# Altium PCB Dustbike_Core.PcbDoc
Units mm, origin at the board's own origin, x right, y up, seen from the top; angles counter-clockwise.
Board outline 79.76 x 109.98 mm, 2 copper layers (Top Layer, Bottom Layer), stack 1.571 mm thick; 41 components, 40 nets, 146 pads, 86 vias.
Unrouted connection lines stored in the file: 30.
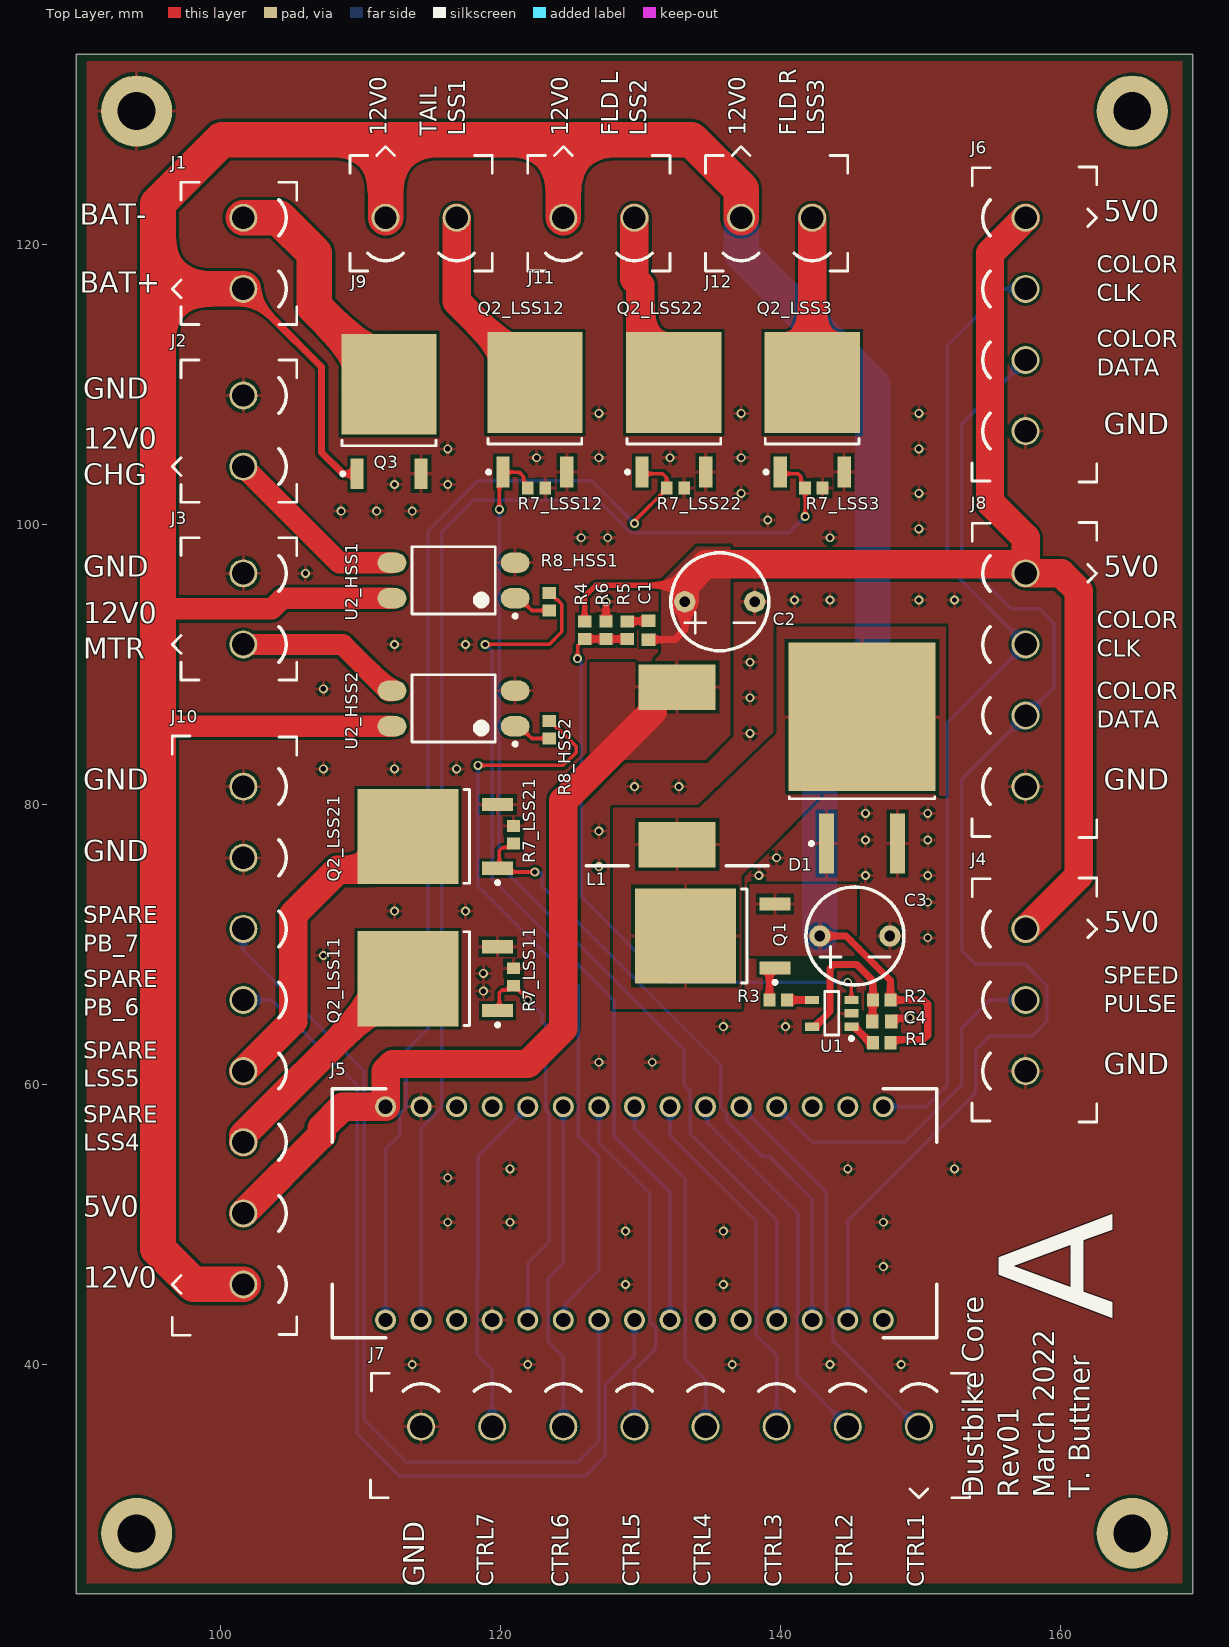
[diagram p0: Top Layer view]
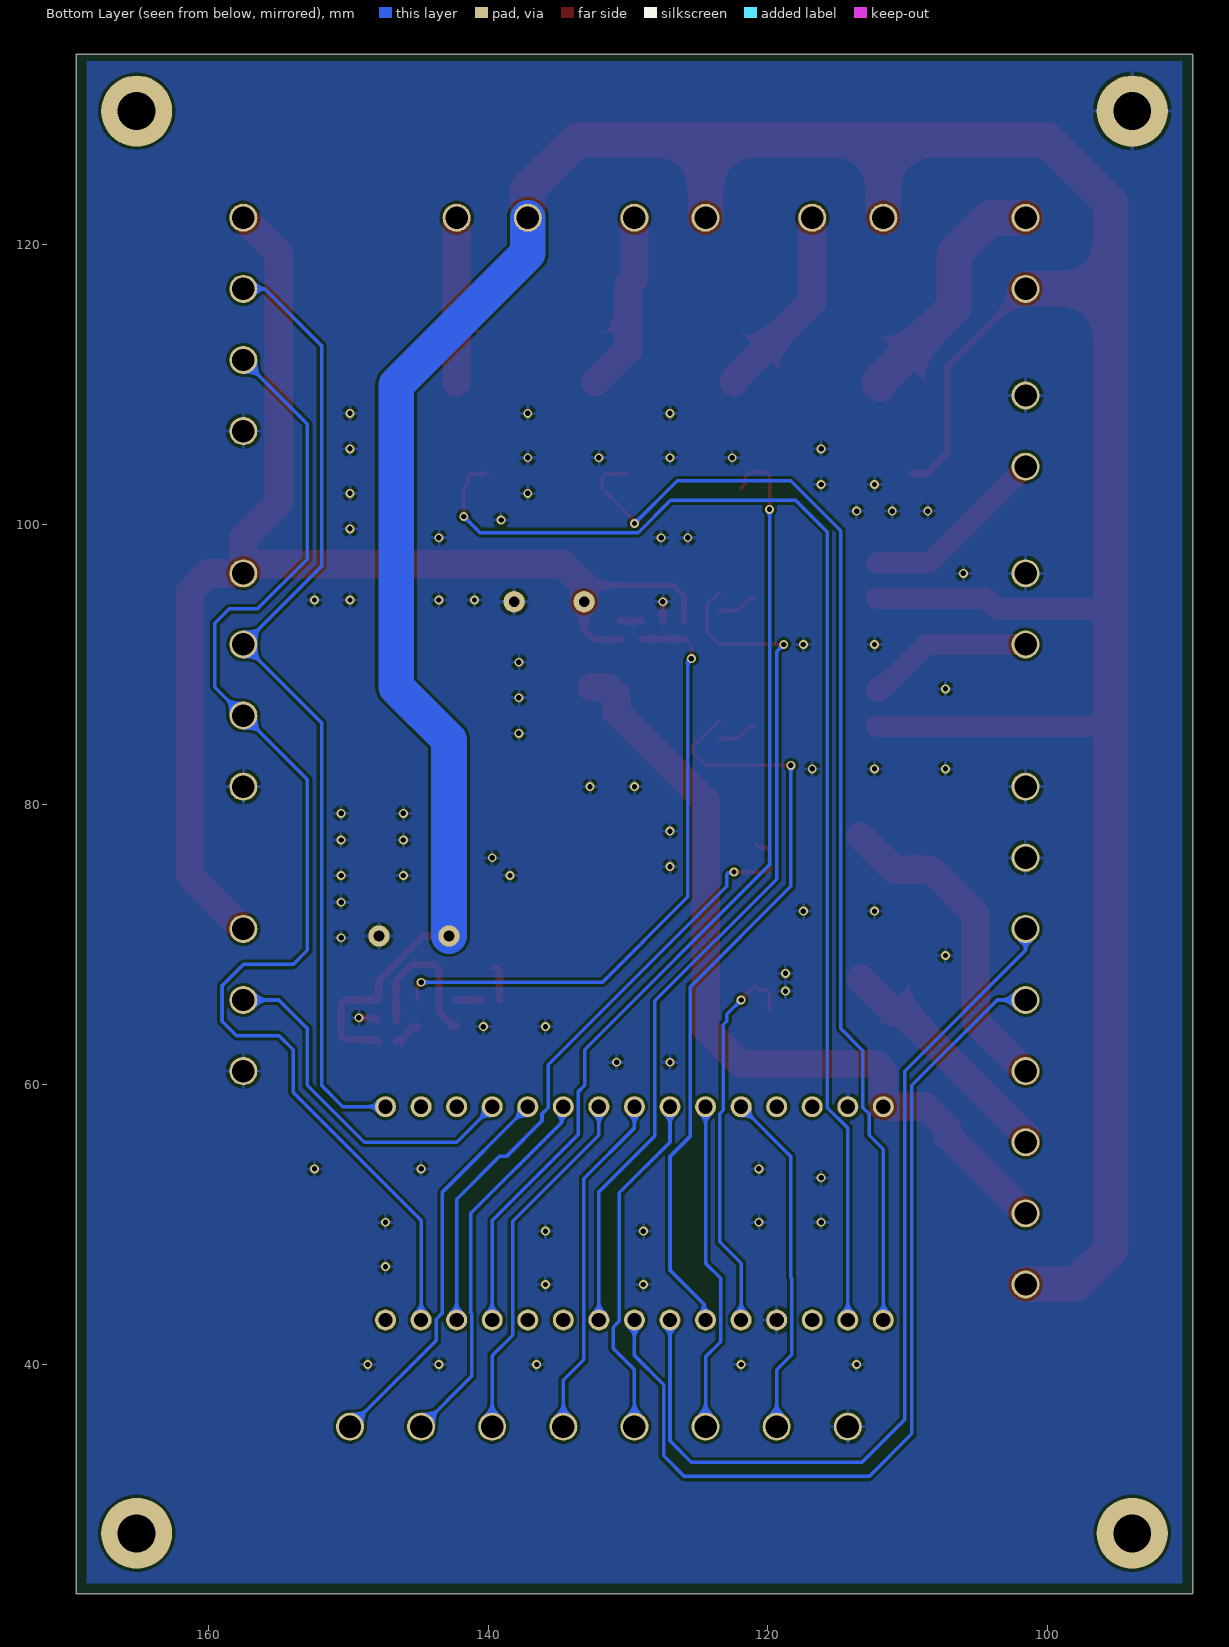
[diagram p1: Bottom Layer view, seen from below]
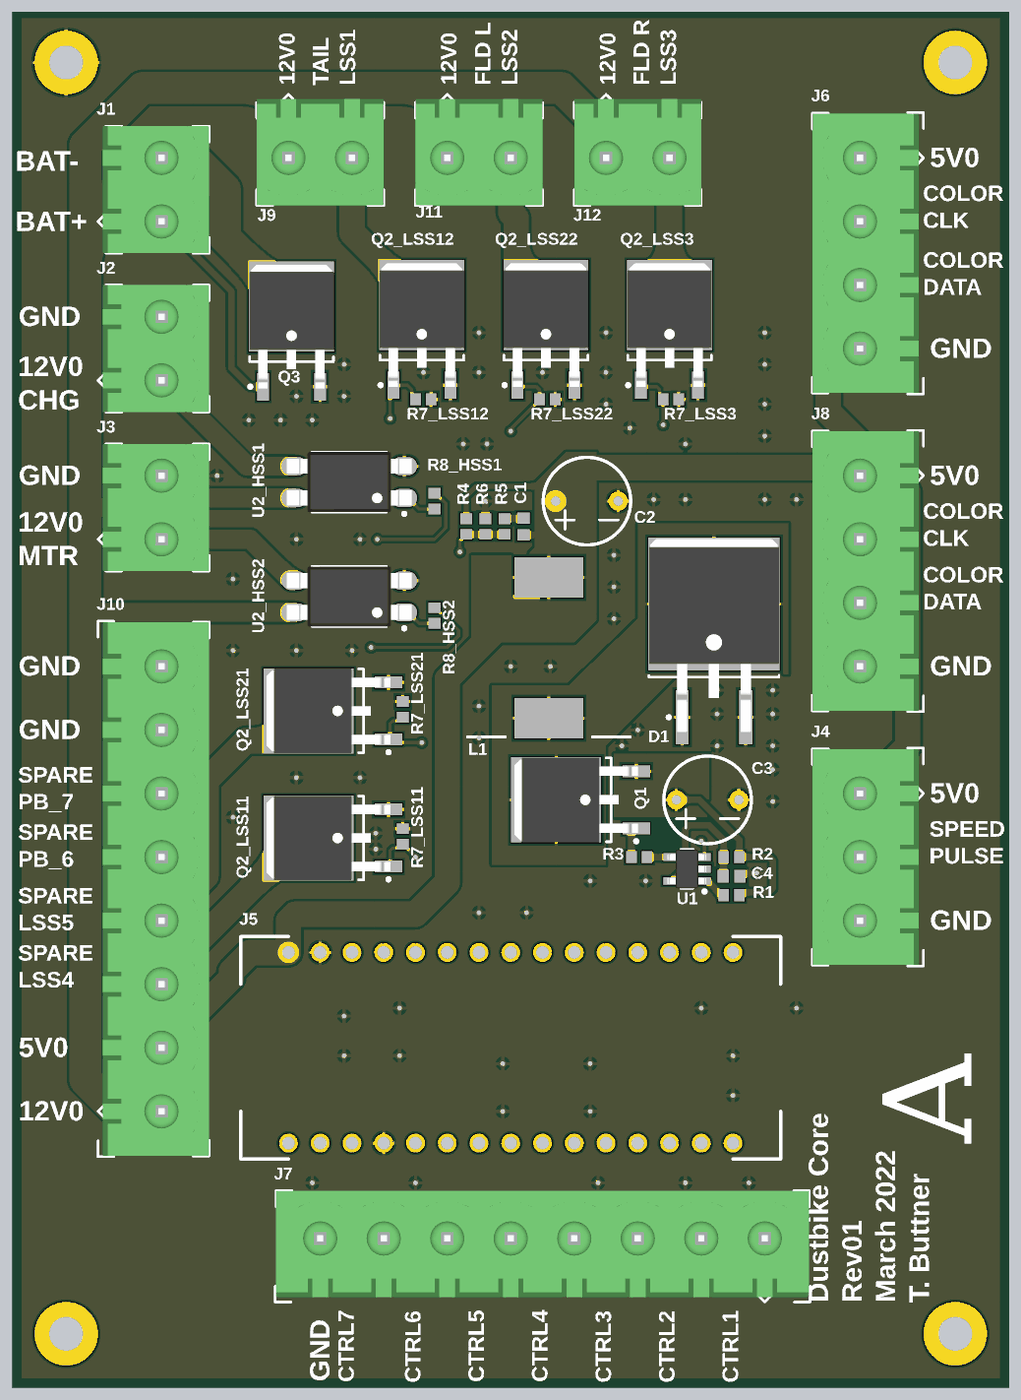
[diagram p2: 3D render of the assembled board from above, using the file's embedded part models]

## Layer stack, top to bottom
Top Solder: solder mask 0.0102, Solder Resist, Dk 3.5
Top Layer: signal copper 0.0356
Dielectric 1: dielectric 1.5, FR-4, Dk 4.8
Bottom Layer: signal copper 0.0356
Bottom Solder: solder mask 0.0102, Solder Resist, Dk 3.5

## Board outline
89.662,23.622 89.662,133.604 169.418,133.604 169.418,23.622

## Design rules (kind name [scope] priority, off if disabled: settings)
Clearance Clearance_1 [All] p1: gap=0.203 ignorepadtopadclearanceinfootprint=FALSE
Clearance Poly_Board_Edge_Clearance [OnLayer('Mechanical 1') vs InPolygon] p2: gap=0.381 ignorepadtopadclearanceinfootprint=FALSE
HoleSize [All] p1: absolutevalues=TRUE maxlimit=6.35 minlimit=0.3 maxpercent=80.000 minpercent=20.000
MinimumSolderMaskSliver [All] p1: minsoldermaskwidth=0.076
PolygonConnect [All] p1: connectstyle=Relief reliefconductorwidth=0.254 reliefentries=4 polygonreliefangle="90 Angle" airgapwidth=0.254
RoomDefinition HSS2 [InComponentClass('HSS2')] p1: confinementstyle=ConfineIn formatcopy=TRUE lockcomponents=FALSE outline 124.46,83.312 124.46,90.932 108.712,90.932 108.712,83.312
RoomDefinition HSS1 [InComponentClass('HSS1')] p2: confinementstyle=ConfineIn formatcopy=TRUE lockcomponents=FALSE outline 124.46,92.456 124.46,100.076 108.712,100.076 108.712,92.456
RoomDefinition LSS22 [InComponentClass('LSS22')] p3: confinementstyle=ConfineIn formatcopy=TRUE lockcomponents=FALSE outline 136.418,101.092 136.418,114.808 128.29,114.808 128.29,101.092
RoomDefinition LSS21 [InComponentClass('LSS21')] p4: confinementstyle=ConfineIn formatcopy=TRUE lockcomponents=FALSE outline 122.428,81.788 108.712,81.788 108.712,73.66 122.428,73.66
RoomDefinition LSS12 [InComponentClass('LSS12')] p5: confinementstyle=ConfineIn formatcopy=TRUE lockcomponents=FALSE outline 126.492,101.092 126.492,114.808 118.364,114.808 118.364,101.092
RoomDefinition LSS11 [InComponentClass('LSS11')] p6: confinementstyle=ConfineIn formatcopy=TRUE lockcomponents=FALSE outline 122.428,71.628 108.712,71.628 108.712,63.5 122.428,63.5
RoomDefinition LSS3 [InComponentClass('LSS3')] p7: confinementstyle=ConfineIn formatcopy=TRUE lockcomponents=FALSE outline 146.304,101.092 146.304,114.808 138.176,114.808 138.176,101.092
RoutingVias [All] p1: holewidth=0.381 width=0.635 viastyle="Through Hole" minholewidth=0.305 minwidth=0.381 maxholewidth=0.711 maxwidth=1.27
SilkToSilkClearance [All] p1: silktosilkclearance=0.076
SilkToSolderMaskClearance [IsPad] p1: minsilkscreentomaskgap=0.076 clearancetoexposedcopper=TRUE
SolderMaskExpansion [All] p1: expansion=0.102 istentingtop=FALSE
Width [All] p1: maxlimit=2.54 minlimit=0.203 preferedwidth=0.254
26 further rules are at their usual default settings.

## Classes and differential pairs
channel class Low_Side_Switch: LSS3 LSS11 LSS12 LSS21 LSS22
channel class High_Side_Switch: HSS1 HSS2
net class CTRL_IN_[1..7]: CTRL_IN_1 CTRL_IN_2 CTRL_IN_3 CTRL_IN_4 CTRL_IN_5 CTRL_IN_6 CTRL_IN_7
component class LSS22: Q2_LSS22 R7_LSS22
component class LSS21: Q2_LSS21 R7_LSS21
component class LSS12: Q2_LSS12 R7_LSS12
component class LSS11: Q2_LSS11 R7_LSS11
component class LSS3: Q2_LSS3 R7_LSS3
component class HSS2: R8_HSS2 U2_HSS2
component class HSS1: R8_HSS1 U2_HSS1
component class Dustbike_Core_Top: J1 J2 J3 J4 J5 J6 J7 J8 J9 J10 J11 J12 Q3 R1
component class BUCK: C1 C2 C3 C4 D1 L1 Q1 R2 R3 R4 R5 R6 U1

## Components (designator, comment, footprint, x,y, rotation, side; value= is the part's Value field where it differs from the comment)
C1 "CAP" CAPC1608X09N 130.556,92.456 r90 top value="1000 pF"
C2 "CAP-POL" CAP_TH_5X12_L5 135.636,94.488 r0 top value=10uF
C3 "CAP-POL" CAP_TH_5X12_L5 145.288,70.612 r0 top value=10uF
C4 "CAP" CAPC1608X09N 147.203,64.516 r0 top value="0.1 uF"
D1 "DIO-Schottky_STPS8L30B-TR" DPAK254P1540X460-3N_STPS5045SG-TR 145.796,83.316 r90 top
J1 "HDR_2POS" WURTH_691311500002 101.6,116.84 r90 top
J2 "HDR_2POS" WURTH_691311500002 101.6,104.14 r90 top
J3 "HDR_2POS" WURTH_691311500002 101.6,91.44 r90 top
J4 "HDR_3POS" WURTH_691311500103 157.48,71.12 r270 top
J5 "NUCLEO_NANO" NANO_HEADER 111.76,43.18 r90 top
J6 "HDR_4POS" WURTH_691311500104 157.48,121.92 r270 top
J7 "HDR_8POS" WURTH_691311500108 149.86,35.56 r180 top
J8 "HDR_4POS" WURTH_691311500104 157.48,96.52 r270 top
J9 "HDR_2POS" WURTH_691311500002 111.76,121.92 r0 top
J10 "HDR_8POS" WURTH_691311500108 101.6,45.72 r90 top
J11 "HDR_2POS" WURTH_691311500002 124.46,121.92 r0 top
J12 "HDR_2POS" WURTH_691311500002 137.16,121.92 r0 top
L1 "INDUCTOR" 125CDMCCDS-100MC 132.588,77.142 r90 top
Q1 "PFET_SOT323" DPAK228P991X238-3N_AOD413A 135.128,70.612 r180 top
Q2_LSS3 "NFET_SOT323" DPAK228P991X238-3N_NTD4815NHT4G 142.24,108.204 r90 top (schematic designator Q2)
Q2_LSS11 "NFET_SOT323" DPAK228P991X238-3N_NTD4815NHT4G 115.316,67.564 r180 top (schematic designator Q2)
Q2_LSS12 "NFET_SOT323" DPAK228P991X238-3N_NTD4815NHT4G 122.428,108.204 r90 top (schematic designator Q2)
Q2_LSS21 "NFET_SOT323" DPAK228P991X238-3N_NTD4815NHT4G 115.316,77.724 r180 top (schematic designator Q2)
Q2_LSS22 "NFET_SOT323" DPAK228P991X238-3N_NTD4815NHT4G 132.354,108.204 r90 top (schematic designator Q2)
Q3 "NFET_SOT323" DPAK228P991X238-3N_NTD4815NHT4G 112.008,108.082 r90 top
R1 "RES" RESC1508X09N 147.203,62.992 r0 top value=82k
R2 "RES" RESC1508X09N 147.203,66.04 r0 top value=10
R3 "RES" RESC1508X09N 139.817,66.04 r180 top value=0
R4 "RES" RESC1508X09N 125.984,92.456 r90 top value=82k
R5 "RES" RESC1508X09N 129.032,92.456 r270 top value=2.7k
R6 "RES" RESC1508X09N 127.508,92.456 r270 top value=20k
R7_LSS3 "RES" RESC1508X09N 142.357,102.616 r180 top value=100k (schematic designator R7)
R7_LSS11 "RES" RESC1508X09N 120.904,67.681 r270 top value=100k (schematic designator R7)
R7_LSS12 "RES" RESC1508X09N 122.545,102.616 r180 top value=100k (schematic designator R7)
R7_LSS21 "RES" RESC1508X09N 120.904,77.841 r270 top value=100k (schematic designator R7)
R7_LSS22 "RES" RESC1508X09N 132.471,102.616 r180 top value=100k (schematic designator R7)
R8_HSS1 "RES" RESC1508X09N 123.444,94.488 r270 top value=100 (schematic designator R8)
R8_HSS2 "RES" RESC1508X09N 123.444,85.344 r270 top value=100 (schematic designator R8)
U1 "R1224N102M" SOT95P280X120-5N_R1224N102M 143.64,65.09 r180 top
U2_HSS1 "SSR_SPST-NO" SOP254P1000X425-4N_TLP241AF 116.621,96.012 r180 top (schematic designator U2)
U2_HSS2 "SSR_SPST-NO" SOP254P1000X425-4N_TLP241AF 116.621,86.868 r180 top (schematic designator U2)

## Footprints (in the part's own frame and the unit in brackets; to place one, negate y for a bottom-side part, rotate by r counter-clockwise, add the part's x,y. Pads: shape width x height; smd on the part's side, far side on the other; paste and mask are expansions set on the pad)
125CDMCCDS-100MC [mm]
  rect 3.25x5.5 smd: 1(0,0) 2(11.25,0)
  silkscreen extent -1.5,-6.5 -1.5,6.5, body extent -1.15,-6.5 12.35,6.5, height 5
CAP_TH_5X12_L5 [mil] "Cap, Aluminum Electrolytic, 5mm Lead Spacing, 12mm Height, Vertical Mount"
  round 60 hole 30: 1(-98.43,0) 2(98.43,0)
  silkscreen extent -138,-138 138,138, body extent -124,-124 124,124, height 472
CAPC1608X09N [mm] "Chip Capacitor, 2-Leads, Body 1.60x0.80mm, IPC Medium Density"
  rect 0.9x1 smd: 1(-0.675,0) 2(0.675,0)
  body extent -0.87,-0.48 0.87,0.47, height 0.95
DPAK228P991X238-3N_AOD413A [mm] "D-PAK, 3-Pads, Body 6.21x6.73mm (max), IPC Medium Density"
  rect 7.2x6.8 smd: D(1.95,0)
  rect 2.2x0.95 smd: G(-4.45,2.28) S(-4.45,-2.28)
  silkscreen extent -4.57,-3.35 -2.05,3.43, body extent -4.6,-3.37 5.31,3.37, height 2.38
DPAK228P991X238-3N_NTD4815NHT4G [mm] "D-PAK, 3-Pads, Body 6.21x6.73mm (max), IPC Medium Density"
  rect 7.2x6.8 smd: D(1.95,0)
  rect 2.2x0.95 smd: G(-4.45,2.28) S(-4.45,-2.28)
  silkscreen extent -4.57,-3.35 -2.05,3.43, body extent -4.6,-3.37 5.31,3.37, height 2.38
DPAK254P1540X460-3N_STPS5045SG-TR [mm] "D2-PAK, 3-Pads, Body 7.78x8.56mm (max), IPC Medium Density"
  rect 4.3x1.05 smd: A(-6.1,-2.54) A(-6.1,2.54)
  rect 10.6x10.5 smd: K(2.95,0)
  silkscreen extent -6.22,-5.2 -2.75,5.2, body extent -7.26,-5.2 8.14,5.2, height 4.6
NANO_HEADER [mm] "Arduino / Nucleo \"Nano\" Headers"
  round 1.5 hole 1.02: 1(0,0) 2(0,-2.54) 3(0,-5.08) 4(0,-7.62) 5(0,-10.16) 6(0,-12.7) 7(0,-15.24) 8(0,-17.78) 9(0,-20.32) 10(0,-22.86) 11(0,-25.4) 12(0,-27.94) 13(0,-30.48) 14(0,-33.02) 15(0,-35.56) 16(15.24,-35.56) 17(15.24,-33.02) 18(15.24,-30.48) 19(15.24,-27.94) 20(15.24,-25.4) 21(15.24,-22.86) 22(15.24,-20.32) 23(15.24,-17.78) 24(15.24,-15.24) 25(15.24,-12.7) 26(15.24,-10.16) 27(15.24,-7.62) 28(15.24,-5.08) 29(15.24,-2.54) 30(15.24,0)
  silkscreen extent -1.27,-39.37 16.51,3.81, body extent -1.27,-39.37 16.51,3.81, height 15
RESC1508X09N [mm] "Chip Resistor, 2-Leads, Body 1.55x0.80mm, IPC Medium Density"
  rect 0.85x0.95 smd: 1(-0.625,0) 2(0.625,0)
  body extent -0.85,-0.48 0.85,0.48, height 0.95
SOP254P1000X425-4N_TLP241AF [mm] "SOP, 4-Leads, Body 4.58x6.40mm, Pitch 2.54mm, IPC Medium Density"
  oval 2.05x1.45 smd: 1(-4.4,1.27) 2(-4.4,-1.27) 3(4.4,-1.27) 4(4.4,1.27)
  silkscreen extent -4.52,-2.4 2.98,2.67, body extent -5,-2.4 5,2.4, height 4.25
SOT95P280X120-5N_R1224N102M [mm] "SOT23, 5-Leads, Body 2.90x2.80mm, Pitch 0.95mm, IPC Medium Density"
  rect 1x0.6 smd: 1(-1.4,0.95) 2(-1.4,0) 3(-1.4,-0.95) 4(1.4,-0.95) 5(1.4,0.95)
  silkscreen extent -1.53,-1.55 0.5,1.92, body extent -1.55,-1.55 1.55,1.55, height 1.2
WURTH_691311500002 [mm]
  round 2 hole 1.6: 1(0,0) 2(5.08,0)
  silkscreen extent -2.54,-3.81 7.62,5.08, body extent -2.54,-3.8 7.62,4.7, height 12
WURTH_691311500103 [mm]
  round 2 hole 1.6: 1(0,0) 2(5.08,0) 3(10.16,0)
  silkscreen extent -3.63,-3.82 13.79,5.08, body extent -3.54,-3.8 13.7,4.7, height 12
WURTH_691311500104 [mm]
  round 2 hole 1.6: 1(0,0) 2(5.08,0) 3(10.16,0) 4(15.24,0)
  silkscreen extent -3.63,-3.82 18.87,5.08, body extent -3.54,-3.8 18.78,4.7, height 12
WURTH_691311500108 [mm]
  round 2 hole 1.6: 1(0,0) 2(5.08,0) 3(10.16,0) 4(15.24,0) 5(20.32,0) 6(25.4,0) 7(30.48,0) 8(35.56,0)
  silkscreen extent -3.63,-3.82 39.17,5.08, body extent -3.54,-3.8 39.1,4.7, height 12

## Part data
C1: library part CAP-SMT-0004, "CAP CER 1000PF 50V X7R 0603", Manufacturer 1="Samsung Electro-Mechanics", Manufacturer Part Number 1=CL10B102KB8NNNC, Operating Temperature="-55°C ~ 125°C", Package / Case=0603, Supplier Part Number 1=1276-1018-1-ND, Temperature Coefficient=X7R, Tolerance=10%, Voltage-Rated=50V, Size / Dimension="0.063\" L x 0.031\" W (1.60mm x 0.80mm)", Supplier 1=Digi-Key, Supplier Link 1=https://www.digikey.com/en/products/detail/samsung-electro-mechanics/CL10B102KB8NNNC/3886676, TPN=CAP-SMT-0004
C2: library part CAP-TH-0004, "CAP ALUM 47UF 20% 25V RADIAL", Lifetime @ Temp=2000, Manufacturer 1=KEMET, Manufacturer Part Number 1=ESK476M025AC3FA, Operating Temperature="-40°C ~ 85°C", Package / Case="Radial, Can", Ripple Current @ High Frequency="202.5 mA @ 10 kHz", Ripple Current @ Low Frequency="135 mA @ 120 Hz", Supplier Part Number 1=399-ESK476M025AC3FACT-ND, Tolerance=20%, Voltage-Rated=25V, ESR=-, Height - Seated (Max)="0.492\"(12.5mm)", Lead Spacing="0.197\" (5.00mm)", Mounting Type="Through Hole", Polarization=Polar, Size / Dimension="0.197\" Dia (5.00mm))", Supplier 1=Digi-Key, Supplier Link 1=https://www.digikey.com/en/products/detail/kemet/ESK476M025AC3FA/13979958, TPN=CAP-TH-0004
C3: library part CAP-TH-0001, "CAP ALUM 10UF 20% 25V RADIAL", Lifetime @ Temp=2000, Manufacturer 1="Panasonic Electronic Components", Manufacturer Part Number 1=ECA-1EM100B, Operating Temperature="-40°C ~ 85°C", Package / Case="Radial, Can", Ripple Current @ High Frequency="85mA @ 10kHz", Ripple Current @ Low Frequency="50mA @ 120Hz", Supplier Part Number 1=P19522CT-ND, Tolerance=20%, Voltage-Rated=25V, ESR=-, Height - Seated (Max)="0.472\" (12.00mm)", Lead Spacing="0.197\" (5.00mm)", Mounting Type="Through Hole", Polarization=Polar, Size / Dimension="0.197\" Dia (5.00mm))", Supplier 1=Digi-Key, Supplier Link 1=https://www.digikey.com/product-detail/en/panasonic-electronic-components/ECA-1EM100B/P19522CT-ND/6109420, TPN=CAP-TH-0001
C4: library part CAP-SMT-0001, "CAP CER 0.1UF 25V X5R 0603", Manufacturer 1="Samsung Electro-Mechanics", Manufacturer 2="Taiyo Yuden", Manufacturer Part Number 1=CL10A104KA8NNNC, Manufacturer Part Number 2=EMK107BJ104KAHT, Operating Temperature="-55°C ~ 85°C", Package / Case=0603, Supplier Part Number 1=1276-1857-1-ND, Temperature Coefficient=X5R, Tolerance=20%, Voltage-Rated=25V, Size / Dimension="0.063\" L x 0.031\" W (1.60mm x 0.80mm)", Supplier 1=Digi-Key, Supplier 2=Digi-Key, Supplier Link 1=http://www.samsungsem.com/kr/support/product-search/mlcc/CL10A104KA8NNNC.jsp, Supplier Part Number 2=587-3308-1-ND, TPN=CAP-SMT-0001
D1: library part DIO-GEN-0003, "DIODE SCHOTTKY 45V 50A D2PAK", Current - Average Rectified (Io)=50A, Current - Reverse Leakage @ Vr="360µA @ 45V", Manufacturer 1=STMicroelectronics, Manufacturer Part Number 1=STPS5045SG-TR, Operating Temperature - Junction="200°C (Max)", Package / Case="TO-263-3, D²Pak (2 Leads + Tab), TO-263AB", Supplier Part Number 1=497-13279-1-ND, Voltage - DC Reverse (Vr) (Max)=45V, Voltage - Forward (Vf) (Max) @ If="610mV @ 50A", Mounting Type="Surface Mount", Speed="Fast Recovery =< 500ns, > 200mA (Io)", Supplier 1=Digi-Key, Supplier 1 Link=https://www.digikey.com/en/products/detail/stmicroelectronics/STPS5045SG-TR/3661704, Supplier Device Packaging=D²PAK, TPN=DIO-GEN-0003
J1 J2 J3 J9 J11 J12: library part GEN-CN-0001, "TERM BLOCK HDR 2POS VERT 5.08MM", Body Color=Green, Current Rating=20A, Manufacturer 1="Würth Elektronik", Manufacturer Part Number 1=691311500002, Operating Temperature="-40°C ~ 105°C", Supplier Part Number 1=732-2052-ND, Voltage - Rated=300V, Connector Type="Header, Male Pins, Shrouded (2 Side)", Contact Material=Brass, Contact Material - Plating=Brass, Gender="Male Pins", Housing Material="Polybutylene Terephthalate (PBT)", Mounting Type="Through Hole", Number of Positions/Contacts=2, Series="WR-TBL Series 3211", Supplier 1=Digi-Key, Supplier Link 1=https://www.digikey.com/en/products/detail/w%C3%BCrth-elektronik/691311500002/2060548, TPN=GEN-CN-0001
J4: library part GEN-CN-0002, "TERM BLOCK HDR 3POS VERT 5.08MM", Body Color=Green, Current Rating=20A, Manufacturer 1="Würth Elektronik", Manufacturer Part Number 1=691311500103, Operating Temperature="-40°C ~ 105°C", Supplier Part Number 1=732-2059-ND, Voltage - Rated=300V, Connector Type="Header, Male Pins, Shrouded (4 Side)", Contact Material=Brass, Contact Material - Plating=Brass, Gender="Male Pins", Housing Material="Polybutylene Terephthalate (PBT)", Mounting Type="Through Hole", Number of Positions/Contacts=3, Series="WR-TBL Series 311", Supplier 1=Digi-Key, Supplier Link 1=https://www.digikey.com/en/products/detail/w%C3%BCrth-elektronik/691311500002/2060548, TPN=GEN-CN-0002
J5: library part MOD-0001, "NUCLEO-32 STM32L432KC EVAL BRD", Manufacturer 1=STMicroelectronics, Manufacturer Part Number 1=NUCLEO-L432KC, Supplier Part Number 1=497-16592-ND, Supplier 1=Digi-Key, Supplier Link 1=https://www.digikey.com/en/products/detail/NUCLEO-L432KC/497-16592-ND/6132763?itemSeq=297939740, TPN=MOD-0001
J6 J8: library part GEN-CN-0003, "TERM BLOCK HDR 4POS VERT 5.08MM", Body Color=Green, Current Rating=20A, Manufacturer 1="Würth Elektronik", Manufacturer Part Number 1=691311500104, Operating Temperature="-40°C ~ 105°C", Supplier Part Number 1=732-2060-ND, Voltage - Rated=300V, Connector Type="Header, Male Pins, Shrouded (4 Side)", Contact Material=Brass, Contact Material - Plating=Brass, Gender="Male Pins", Housing Material="Polybutylene Terephthalate (PBT)", Mounting Type="Through Hole", Number of Positions/Contacts=4, Series="WR-TBL Series 311", Supplier 1=Digi-Key, Supplier Link 1=https://www.digikey.com/en/products/detail/w%C3%BCrth-elektronik/691311500104/2060556, TPN=GEN-CN-0003
J7 J10: library part GEN-CN-0004, "TERM BLOCK HDR 8POS VERT 5.08MM", Body Color=Green, Current Rating=20A, Manufacturer 1="Würth Elektronik", Manufacturer Part Number 1=691311500108, Operating Temperature="-40°C ~ 105°C", Supplier Part Number 1=732-2063-ND, Voltage - Rated=300V, Connector Type="Header, Male Pins, Shrouded (4 Side)", Contact Material=Brass, Contact Material - Plating=Brass, Gender="Male Pins", Housing Material="Polybutylene Terephthalate (PBT)", Mounting Type="Through Hole", Number of Positions/Contacts=8, Series="WR-TBL Series 311", Supplier 1=Digi-Key, Supplier Link 1=https://www.digikey.com/en/products/detail/w%C3%BCrth-elektronik/691311500108/2060559, TPN=GEN-CN-0004
L1: library part IND-0001, "FIXED IND 10UH 9A 22 MOHM SMD", Current - Saturation (Isat)=14A, Current Rating (Amps)=9A, DC Resistance (DCR)="22mΩ Max", Inductance=10µH, Inductance Frequency - Test="100 kHz", Manufacturer 1="Sumida America Components Inc.", Manufacturer Part Number 1=125CDMCCDS-100MC, Operating Temperature="-55°C ~ 125°C", Package / Case=Nonstandard, Supplier Device Package=SMD, Supplier Part Number 1=308-2561-1-ND, Tolerance=±20%, Height - Seated (Max)="0.197\" (5.00MM)", Mounting Type="Surface Mount", Shielding=Shielded, Size / Dimension="0.530\" L x 0.496\" W (13.45mm x 12.60mm)", Supplier 1=Digi-Key, TPN=IND-0001
Q1: library part PMOS-0001, "MOSFET P-CH 40V 12A TO252", Current - Continuous Drain (Id)="12A (Tc)", Drain to Source Voltage (Vdss)=40V, Drive Voltage (Max Rds On, Min Rds On)="4.5V, 10V", Manufacturer="Alpha & Omega Semiconductor Inc.", Manufacturer Part Number=AOD413A, Operating Temperature="-55°C ~ 175°C (TJ)", Package / Case="TO-252-3, DPak (2 Leads + Tab), SC-63", Supplier 1 Part Number=785-1218-1-ND, ComponentLink1Description=Datasheet, ComponentLink1URL=http://aosmd.com/res/data_sheets/AOD413A.pdf, ComponentLink2Description="Supplier Link", ComponentLink2URL=https://www.digikey.com/en/products/detail/alpha-omega-semiconductor-inc/AOD413A/2353883, Gate Charge (Qg) (Max) @ Vgs="21nC @ 10V", Rds On (Max) @ Id, Vgs="44mOhm @ 12A, 10V", Supplier 1=Digi-Key, TPN=PMOS-0001, Type=P-Channel, Vgs (Max)=±20V, Vgs(th) (Max) @ Id="3V @ 250µA"
Q2_LSS3 Q2_LSS11 Q2_LSS12 Q2_LSS21 Q2_LSS22 Q3: library part NMOS-0002, "MOSFET N-CH 30V 6.9A/35A DPAK", Current - Max Continuous=6.9A, Drain to Source Voltage (Vdss)=30V, Drive Voltage (Max Rds On, Min Rds On)="4.5V, 11.5V", Manufacturer=onsemi, Manufacturer Part Number=NTD4815NHT4G, Operating Temperature="-55°C ~ 175°C (TJ)", Package / Case="TO-252-3, DPak (2 Leads + Tab), SC-63", Supplier 1 Part Number=NTD4815NHT4GOSCT-ND, ComponentLink1Description=Datasheet, ComponentLink1URL=https://www.onsemi.com/pdf/datasheet/ntd4815nh-d.pdf, ComponentLink2Description="Supplier Link", ComponentLink2URL=https://www.digikey.com/en/products/detail/onsemi/NTD4815NHT4G/1792971, Gate Charge (Qg) (Max) @ Vgs="6.8 nC @ 4.5 V", Gate Charge (Qg) @ Vgs="6.8 nC @ 4.5 V", Rds On (Max) @ Id, Vgs="15mOhm @ 30A, 10V", Supplier 1=Digi-Key, TPN=NMOS-0002, Type=NFET, Vgs (Max)=20V, Vgs(th) (Max) @ Id="2.5V @ 250µA"
R1 R4: library part RES-SM-0288, Package=0603, Power Rating=0.125, Tolerance=5%, Pulse-Rated=No, TPN=RES-SM-0288
R2: library part RES-SM-0194, Package=0603, Power Rating=0.125, Tolerance=5%, Pulse-Rated=No, TPN=RES-SM-0194
R3: library part RES-SM-0677, "RES 0 OHM JUMPER 1/10W 0603", Manufacturer 1="Stackpole Electronics Inc", Manufacturer 2=Yageo, Manufacturer Part Number 1=RMCF0603ZT0R00, Manufacturer Part Number 2=RC0603JR-070RL, Package=0603, Power Rating=0.1, Supplier Part Number 1=RMCF0603ZT0R00TR-ND, Pulse-Rated=No, Supplier 1=Digi-Key, Supplier 2=Digi-Key, Supplier Link 1=https://www.seielect.com/Catalog/SEI-RMCF_RMCP.pdf, Supplier Part Number 2=311-0.0GRTR-ND, TPN=RES-SM-0677
R5: library part RES-SM-0252, Package=0603, Power Rating=0.125, Tolerance=5%, Pulse-Rated=No, TPN=RES-SM-0252
R6: library part RES-SM-0273, Package=0603, Power Rating=0.125, Tolerance=5%, Pulse-Rated=No, TPN=RES-SM-0273
R7_LSS3 R7_LSS11 R7_LSS12 R7_LSS21 R7_LSS22: library part RES-SM-0290, Package=0603, Power Rating=0.125, Tolerance=5%, Pulse-Rated=No, TPN=RES-SM-0290
R8_HSS1 R8_HSS2: library part RES-SM-0218, Package=0603, Power Rating=0.125, Tolerance=5%, Pulse-Rated=No, TPN=RES-SM-0218
U1: library part ICS-DSC-0002, "PWM/VFM STEP-DOWN DCDC CONTROLLE", Frequency -  Switching=180KhZ, Manufacturer 1="Nisshinbo Micro Devices Inc.", Manufacturer Part Number 1=R1224N102M-TR-FE, Operating Temperature="-40°C ~ 85°C", Package / Case="SC-74A, SOT-753", Supplier Device Package=SOT-23-5, Supplier Part Number 1=2129-R1224N102M-TR-FECT-ND, Voltage - Supply="2.3v ~ 18.5v", Clock Sync=No, Control Features=Enable, Duty Cycle (Max)=1, Function=Step-Down, Mounting Type="Surface Mount", Number of Outputs=1, Output Configuration=Postive, Output Phases=1, Output Type="Transistor Driver", Serial Interfaces=-, Supplier 1=Digi-Key, Supplier Link 1=https://www.digikey.com/en/products/detail/nisshinbo-micro-devices-inc/R1224N102M-TR-FE/10244897?utm_medium=buyNow&utm_source=FindChips, Synchronous Rectifier=No, Topology=Buck, TPN=ICS-DSC-0002
U2_HSS1 U2_HSS2: library part SSR-0001, "SSR RELAY SPST-NO 2A 0-40V", Current - Max Continuous=2A, Manufacturer="Toshiba Semiconductor and Storage", Manufacturer Part Number=TLP241AF(TP4,F, On-State Resistance (Max)=150mΩ, Package / Case="4-SMD (0.400\", 10.16mm)", Supplier 1 Part Number=TLP241AF(TP4FCT-ND, Voltage - Load="0V ~ 40V", Voltage-Input=1.27VDC, ComponentLink1Description=Datasheet, ComponentLink1URL=https://toshiba.semicon-storage.com/info/docget.jsp?did=14237&prodName=TLP241A, ComponentLink2Description="Supplier Link", ComponentLink2URL=https://www.digikey.com/en/products/detail/toshiba-semiconductor-and-storage/TLP241AF-TP4-F/7652708, Supplier 1=Digi-Key, TPN=SSR-0001

## Free pads (board coordinates)
  round 5.08 hole 2.705: MNT(93.98,27.94) MNT(93.98,129.54) MNT(165.1,27.94) MNT(165.1,129.54)

## Via types
v1: diameter 0.635, hole 0.381, Top Layer to Bottom Layer, tented both sides, 86 vias

## Nets (pads, with @x,y where several pads share a name; then routed paths per layer and width w, separated by ;. In a path a pad name is that pad's centre, name@x,y a point inside that pad or via, vN(x,y) a via of type N, cw(c..) or ccw(c..) an arc to the next point about the centre after c; other vN are vias at no path point)
5V0: C1.1 C2.1 J4.1 J5.30 J6.1 J8.1 J10.2 L1.2 R4.2 | length 156.6
  Top Layer w0.381: R4.2 125.984,94.869 126.786,95.671 133.136,95.671
  Top Layer w0.508: C1.1 132.421,91.781 133.136,92.496 C2.1
  Top Layer w2.032: J10.2 107.188,56.388 107.188,56.896 108.712,58.42 J5.30 111.76,60.96 112.268,61.468 121.92,61.468 124.46,64.008 124.46,80.264 130.854,86.658 130.854,87.783 131.463,88.392 L1.2 ; C2.1 133.136,95.671 134.62,97.155 156.845,97.155 J8.1 ; J4.1 161.29,74.93 161.29,95.25 160.02,96.52 J8.1 ; J6.1 154.94,119.38 154.94,101.6 157.48,99.06 J8.1
12V0: C3.1 J1.1 J9.1 J10.1 J11.1 J12.1 Q1.S Q3.G R1.2 R2.2 U2_HSS1.4 U2_HSS2.4 | length 269.8
  Top Layer w0.508: J1.1 103.632,114.808 107.188,111.252 107.188,105.156 108.712,103.632 Q3.G ; C3.1 144.653,70.612 147.828,67.437 R2.2 150.197,66.04 150.495,65.742 150.495,63.511 150.197,63.213 147.999,63.213 147.828,63.042 R1.2
  Top Layer w1.524: 95.504,85.344 95.758,85.598 U2_HSS2.4 ; 95.504,94.488 96.012,93.98 103.632,93.98 104.394,94.742 U2_HSS1.4
  Top Layer w2.54: J10.1 98.044,45.72 95.504,48.26 95.504,85.344 95.504,94.488 95.504,116.84 ; J1.1 95.504,116.84 ; J9.1 111.76,127.508 ; J11.1 124.46,127.508 ; J12.1 137.16,123.952 133.604,127.508 124.46,127.508 ; 95.504,116.84 95.504,122.936 100.076,127.508 111.76,127.508 ; 111.76,127.508 124.46,127.508
  Bottom Layer w2.54: J12.1 137.16,119.38 146.558,109.982 146.558,88.392 142.788,84.622 C3.1
12V0_CHARGE: J2.1 U2_HSS1.3 | length 13.5
  Top Layer w1.524: J2.1 108.458,97.282 U2_HSS1.3
12V0_METER: J3.1 U2_HSS2.3 | length 12
  Top Layer w1.524: J3.1 108.693,91.44 111.995,88.138 U2_HSS2.3
CHARGE_EN: J5.9 R8_HSS1.1 | length 62.8
  Top Layer w0.254: v1(118.872,91.44) 123.444,91.44 124.355,92.351 124.355,94.319 124.056,94.618 123.989,94.618 123.494,95.113 R8_HSS1.1
  Bottom Layer w0.254: v1(118.872,91.44) 119.38,90.932 119.38,74.676 128.08,65.976 128.08,56.324 132.08,52.324 J5.9
COLOR_CLK: J5.16 J6.2 J8.2 | length 69.9
  Bottom Layer w0.254: J5.16 150.368,58.42 151.892,59.944 151.892,85.852 J8.2 151.892,97.028 151.892,112.776 155.956,116.84 J6.2
COLOR_DATA: J5.14 J6.3 J8.3 | length 89.4
  Bottom Layer w0.254: J5.14 144.78,50.292 153.924,59.436 153.924,62.484 154.94,63.5 157.988,63.5 159.004,64.516 159.004,67.056 157.48,68.58 153.924,68.58 152.908,69.596 152.908,81.788 J8.3 159.512,88.392 159.512,92.964 158.496,93.98 156.464,93.98 152.908,97.536 152.908,107.188 J6.3
COLOR_MISO_NC: J5.15
CTRL_IN_1: J5.20 J7.1 | length 28.1
  Bottom Layer w0.254: J5.20 143.256,52.324 143.256,43.688 143.7,43.244 143.7,41.72 J7.1
CTRL_IN_2: J5.21 J7.2 | length 27.1
  Bottom Layer w0.254: J5.21 134.735,58.305 134.735,57.289 141.224,50.8 141.224,43.688 141.16,43.624 141.16,39.18 J7.2
CTRL_IN_3: J5.22 J7.3 | length 26
  Bottom Layer w0.254: J5.22 132.08,56.388 138.24,50.228 138.24,42.1 139.7,40.64 J7.3
CTRL_IN_4: J5.23 J7.4 | length 25
  Bottom Layer w0.254: J5.23 129.54,56.896 133.16,53.276 133.16,40.336 134.62,38.876 J7.4
CTRL_IN_5: J5.24 J7.5 | length 25.2
  Bottom Layer w0.254: J5.24 127,55.88 130.62,52.26 130.62,43.112 131.064,42.668 131.064,41.148 129.54,39.624 J7.5
CTRL_IN_6: J5.25 J7.6 | length 23.8
  Bottom Layer w0.254: J7.6 124.46,40.558 123.38,41.638 123.38,46.164 124.46,47.244 J5.25
CTRL_IN_7: J5.26 J7.7 | length 24.8
  Bottom Layer w0.254: J7.7 119.38,39.624 118.3,40.704 118.3,46.164 118.364,46.228 118.364,54.864 J5.26
FLOOD_L_EN: J5.1 Q2_LSS22.G R7_LSS22.2 | length 81.8
  Top Layer w0.254: v1(129.54,100.076) 129.613,100.149 129.613,100.333 131.846,102.566 R7_LSS22.2 131.846,103.358 131.572,103.632 130.196,103.632 Q2_LSS22.G
  Bottom Layer w0.254: J5.1@111.76,42.672 J5.1 111.76,55.372 112.776,56.388 112.776,57.908 113.22,58.352 113.22,62.42 114.808,64.008 114.808,99.568 118.364,103.124 126.492,103.124 v1(129.54,100.076)
FLOOD_R_EN: J5.2 Q2_LSS3.G R7_LSS3.2 | length 89.8
  Top Layer w0.254: Q2_LSS3.G 140.082,103.632 141.224,103.632 141.434,103.422 141.434,102.914 R7_LSS3.2 v1(141.732,100.584)
  Bottom Layer w0.254: J5.2 114.3,56.892 115.76,58.352 115.76,99.47 118.029,101.74 126.96,101.74 129.272,99.428 140.576,99.428 v1(141.732,100.584)
GND: C2.2 C3.2 C4.2 D1.A J2.2 J3.2 J4.3 J5.4 J5.29 J6.4 J7.8 J8.4 J10.7 J10.8 pad.MNT@93.98,129.54 Q2_LSS3.S Q2_LSS11.S Q2_LSS12.S Q2_LSS21.S Q2_LSS22.S Q3.S R6.1 R7_LSS3.1 R7_LSS11.1 R7_LSS12.1 R7_LSS21.1 R7_LSS22.1 U1.2 U2_HSS1.2 U2_HSS2.2 | length 2.9
  Top Layer w0.508: R6.1 v1(127.508,94.488) ; C4.2 147.878,64.55 148.074,64.746 149.201,64.746 v1(149.225,64.77)
  other v1: 113.665,40.005 121.92,40.005 136.525,40.005 143.51,40.005 148.59,40.005 128.905,45.72 135.89,45.72 147.32,46.99 128.905,49.53 135.89,49.53 116.205,50.165 120.65,50.165 147.32,50.165 116.205,53.34 120.65,53.975 144.78,53.975 152.4,53.975 127,61.595 130.81,61.595 135.89,64.135 140.335,64.135 118.745,66.675 118.745,67.945 107.315,69.215 150.495,70.485 112.395,72.39 117.475,72.39 150.495,73.025 138.43,74.93 146.05,74.93 150.495,74.93 127,75.565 139.7,76.2 146.05,77.47 150.495,77.47 127,78.105 146.05,79.375 150.495,79.375 129.54,81.28 132.715,81.28 107.315,82.55 112.395,82.55 116.84,82.55 137.795,85.09 137.795,87.63 107.315,88.265 137.795,90.17 112.395,91.44 117.475,91.44 140.97,94.615 143.51,94.615 149.86,94.615 152.4,94.615 106.045,96.52 125.73,99.06 127.635,99.06 143.51,99.06 149.86,99.695 139.065,100.33 108.585,100.965 111.125,100.965 113.665,100.965 137.16,102.235 149.86,102.235 112.395,102.87 116.205,102.87 122.555,104.775 127,104.775 132.08,104.775 137.16,104.775 116.205,105.41 149.86,105.41 127,107.95 137.16,107.95 149.86,107.95
LSS1_TAIL: J9.2 Q2_LSS12.D | length 14.1
  Top Layer w2.032: J9.2 116.84,115.942 122.428,110.354 Q2_LSS12.D
LSS2_L_FLOOD: J11.2 Q2_LSS22.D | length 12.9
  Top Layer w2.032: J11.2 129.54,117.544 129.97,117.114 129.97,112.538 Q2_LSS22.D
LSS3_R_FLOOD: J12.2 Q2_LSS3.D | length 11.8
  Top Layer w2.032: Q2_LSS3.D J12.2
LSS4_SPARE: J10.3 Q2_LSS11.D | length 16.9
  Top Layer w2.032: J10.3 101.6,56.388 110.392,65.18 110.982,65.18 Q2_LSS11.D
LSS5_SPARE: J10.4 Q2_LSS21.D | length 23.2
  Top Layer w2.032: J10.4 105.156,64.516 105.156,72.136 108.36,75.34 110.982,75.34 Q2_LSS21.D
NetC1_2: C1.2 R5.1 | length 1.5
  Top Layer w0.508: R5.1 129.057,93.106 130.531,93.106 C1.2
NetC4_1: C4.1 R2.1 U1.5 | length 11.4
  Top Layer w0.508: U1.5 142.44,64.14 143.51,65.21 143.51,68.282 143.808,68.58 145.415,68.58 146.578,67.417 R2.1 146.553,66.015 146.553,64.541 C4.1
NetD1_K: D1.K L1.1 Q1.D
NetJ1_2: J1.2 Q3.D | length 17.7
  Top Layer w2.54: J1.2 104.14,121.92 106.68,119.38 106.68,115.56 112.008,110.232 Q3.D
NetQ1_G: Q1.G R3.2 | length 2.5
  Top Layer w0.508: R3.2 139.192,68.111 139.413,68.332 Q1.G
NetR1_1: R1.1 U1.1 | length 2
  Top Layer w0.508: U1.1 145.24,64.14 146.167,63.213 146.407,63.213 146.578,63.042 R1.1
NetR3_1: R3.1 U1.4 | length 1.8
  Top Layer w0.508: R3.1 U1.4
NetR4_1: R4.1 R5.2 R6.2 U1.3 | length 44.8
  Top Layer w0.254: v1(125.476,90.424) 125.476,91.323 125.636,91.483 125.636,91.533 125.934,91.831 R4.1 ; v1(144.78,67.31) 145.04,67.05 U1.3
  Top Layer w0.508: R4.1 R6.2 R5.2
  Bottom Layer w0.254: v1(125.476,90.424) 125.581,90.424 125.73,90.275 125.73,73.406 131.826,67.31 v1(144.78,67.31)
NetR8_HSS1_2: R8_HSS1.2 U2_HSS1.1 | length 2.8
  Top Layer w0.254: U2_HSS1.1 121.321,94.742 122.2,93.863 R8_HSS1.2
NetR8_HSS2_2: R8_HSS2.2 U2_HSS2.1 | length 2.8
  Top Layer w0.254: U2_HSS2.1 121.321,85.598 122.2,84.719 R8_HSS2.2
SPARE_PA_11: J5.13 Q2_LSS21.G R7_LSS21.2 | length 46
  Top Layer w0.254: R7_LSS21.2 120.606,76.918 120.098,76.918 119.888,76.708 119.888,75.566 Q2_LSS21.G 120.026,75.184 v1(122.428,75.184)
  Bottom Layer w0.254: v1(122.428,75.184) 122.467,75.145 122.826,75.145 122.936,75.035 122.936,74.168 135.7,61.404 135.7,58.352 136.144,57.908 136.144,57.404 138.684,54.864 139.192,54.864 142.24,51.816 J5.13
SPARE_PA_12: J5.5 Q2_LSS11.G R7_LSS11.2 | length 28.1
  Top Layer w0.254: Q2_LSS11.G 119.888,65.406 119.888,66.548 120.098,66.758 120.606,66.758 R7_LSS11.2 120.954,67.056 121.92,66.09 v1(121.92,66.04)
  Bottom Layer w0.254: J5.5 121.92,47.244 123.444,48.768 123.444,57.908 123.19,58.162 123.19,64.262 122.936,64.516 122.936,65.024 v1(121.92,66.04)
SPARE_PB_6: J5.8 J10.5 | length 65.7
  Bottom Layer w0.254: J10.5 103.632,66.04 109.728,59.944 109.728,35.052 112.776,32.004 125.984,32.004 127.457,33.477 127.457,38.557 129.54,40.64 J5.8
SPARE_PB_7: J5.7 J10.6 | length 65.9
  Bottom Layer w0.254: J10.6 101.6,69.596 110.236,60.96 110.236,36.068 113.284,33.02 125.476,33.02 127,34.544 J5.7
SPEED_PULSE_IN: J4.2 J5.19 | length 25.4
  Bottom Layer w0.254: J5.19 142.24,55.88 148.844,55.88 152.908,59.944 152.908,64.008 154.94,66.04 J4.2
TAILLIGHT_EN: J5.12 Q2_LSS12.G R7_LSS12.2 | length 71.4
  Top Layer w0.254: v1(119.888,101.092) 119.888,103.494 Q2_LSS12.G 121.29,103.754 121.622,103.422 121.622,102.914 R7_LSS12.2
  Bottom Layer w0.254: v1(119.888,101.092) 119.888,75.692 133.096,62.484 133.096,59.944 133.54,59.5 133.54,56.452 139.7,50.292 J5.12
VMETER_EN: J5.6 R8_HSS2.1 | length 54.8
  Top Layer w0.254: v1(118.364,82.804) 124.46,82.804 125.371,83.715 125.371,84.159 124.056,85.474 123.989,85.474 123.494,85.969 R8_HSS2.1
  Bottom Layer w0.254: v1(118.364,82.804) 118.364,74.168 125.54,66.992 125.54,56.324 127,54.864 127,46.736 124.575,44.311 124.575,43.295 J5.6
pads on no net: J5.3 J5.10 J5.11 J5.17 J5.18 J5.27 J5.28

## Polygon pours and split planes (outlines as drawn)
GND on Top Layer "TOP_GND_POUR" (solid, remove dead copper, pour order 3): 90.424,24.384 90.424,133.096 168.656,133.096 168.656,24.384
NetD1_K on Top Layer "NETD1_K_L01_P001" (solid, pour order 1): 137.16,65.405 128.016,65.405 128.016,79.756 134.153,79.756 139.7,85.09 139.7,92.71 151.765,92.71 151.765,80.645 142.875,80.645 137.16,74.93 137.16,73.66
5V0 on Top Layer "5V0_L01_P002" (solid, pour order 2): 126.365,83.185 134.62,83.185 136.398,84.963 136.398,98.425 133.985,98.425 131.445,95.885 131.445,90.805 130.81,90.17 126.365,90.17
12V0 on Top Layer "12V0_L01_P000" (solid, pour order 0): 137.795,74.295 137.795,69.215 145.415,69.215 145.415,74.295
GND on Bottom Layer "BTM_GND_POUR" (solid, remove dead copper, pour order 4): 90.424,24.384 90.424,133.096 168.656,133.096 168.656,24.384

## Silkscreen, mask and mechanical layers (free items; w line width, h text height)
Top Overlay:
  text "12V0" at 112.244,127.762 h2.03 r90
  text "TAIL / LSS1" at 117.856,127.762 h2.03 r90
  text "12V0" at 125.198,127.762 h2.03 r90
  text "FLD L / LSS2" at 130.81,127.762 h2.03 r90
  text "12V0" at 137.898,127.762 h2.03 r90
  text "FLD R / LSS3" at 143.51,127.762 h2.03 r90
  text "5V0" at 163.068,121.188 h2.54
  text "BAT-" at 89.916,120.904 h2.54
  text "BAT+" at 89.916,116.078 h2.54
  text "COLOR / CLK" at 162.56,115.57 h2.03
  text "COLOR / DATA" at 162.56,110.236 h2.03
  text "GND" at 90.17,108.488 h2.54
  text "GND" at 163.068,105.948 h2.54
  text "12V0 / CHG" at 90.17,102.362 h2.54
  text "GND" at 90.17,95.788 h2.54
  text "5V0" at 163.068,95.788 h2.54
  text "COLOR / CLK" at 162.56,90.17 h2.03
  text "12V0 / MTR" at 90.17,89.916 h2.54
  text "COLOR / DATA" at 162.56,85.09 h2.03
  text "GND" at 90.17,80.548 h2.54
  text "GND" at 163.068,80.548 h2.54
  text "GND" at 90.17,75.468 h2.54
  text "5V0" at 163.068,70.388 h2.54
  text "SPARE / PB_7" at 90.17,69.088 h2.03
  text "SPEED / PULSE" at 163.068,64.77 h2.03
  text "SPARE / PB_6" at 90.17,64.516 h2.03
  text "GND" at 163.068,60.228 h2.54
  text "SPARE / LSS5" at 90.17,59.436 h2.03
  text "SPARE / LSS4" at 90.17,54.864 h2.03
  text "5V0" at 90.17,50.068 h2.54
  text "12V0" at 90.17,44.988 h2.54
  text "A" at 166.37,43.19 h13.97 r90
  text "Dustbike Core / Rev01 / March 2022 / T. Buttner" at 162.56,30.48 h2.54 r90
  text "GND" at 115.032,24.13 h2.54 r90
  text "CTRL7" at 119.888,24.13 h2.03 r90
  text "CTRL5" at 130.302,24.13 h2.03 r90
  text "CTRL4" at 135.382,24.13 h2.03 r90
  text "CTRL6" at 125.225,24.082 h2.03 r90
  text "CTRL3" at 140.465,24.082 h2.03 r90
  text "CTRL2" at 145.545,24.082 h2.03 r90
  text "CTRL1" at 150.625,24.082 h2.03 r90
Mechanical 1:
  the board outline again, w0.2